# Altium PCB PCB1.PcbDoc
Units mm, origin at the board's own origin, x right, y up, seen from the top; angles counter-clockwise.
Board outline 76.2 x 38.1 mm, 4 copper layers (Top Layer, Layer 1, Layer 2, Bottom Layer), stack 0.603 mm thick; 33 components, 74 nets, 392 pads, 206 vias.
Unrouted connection lines stored in the file: 22.
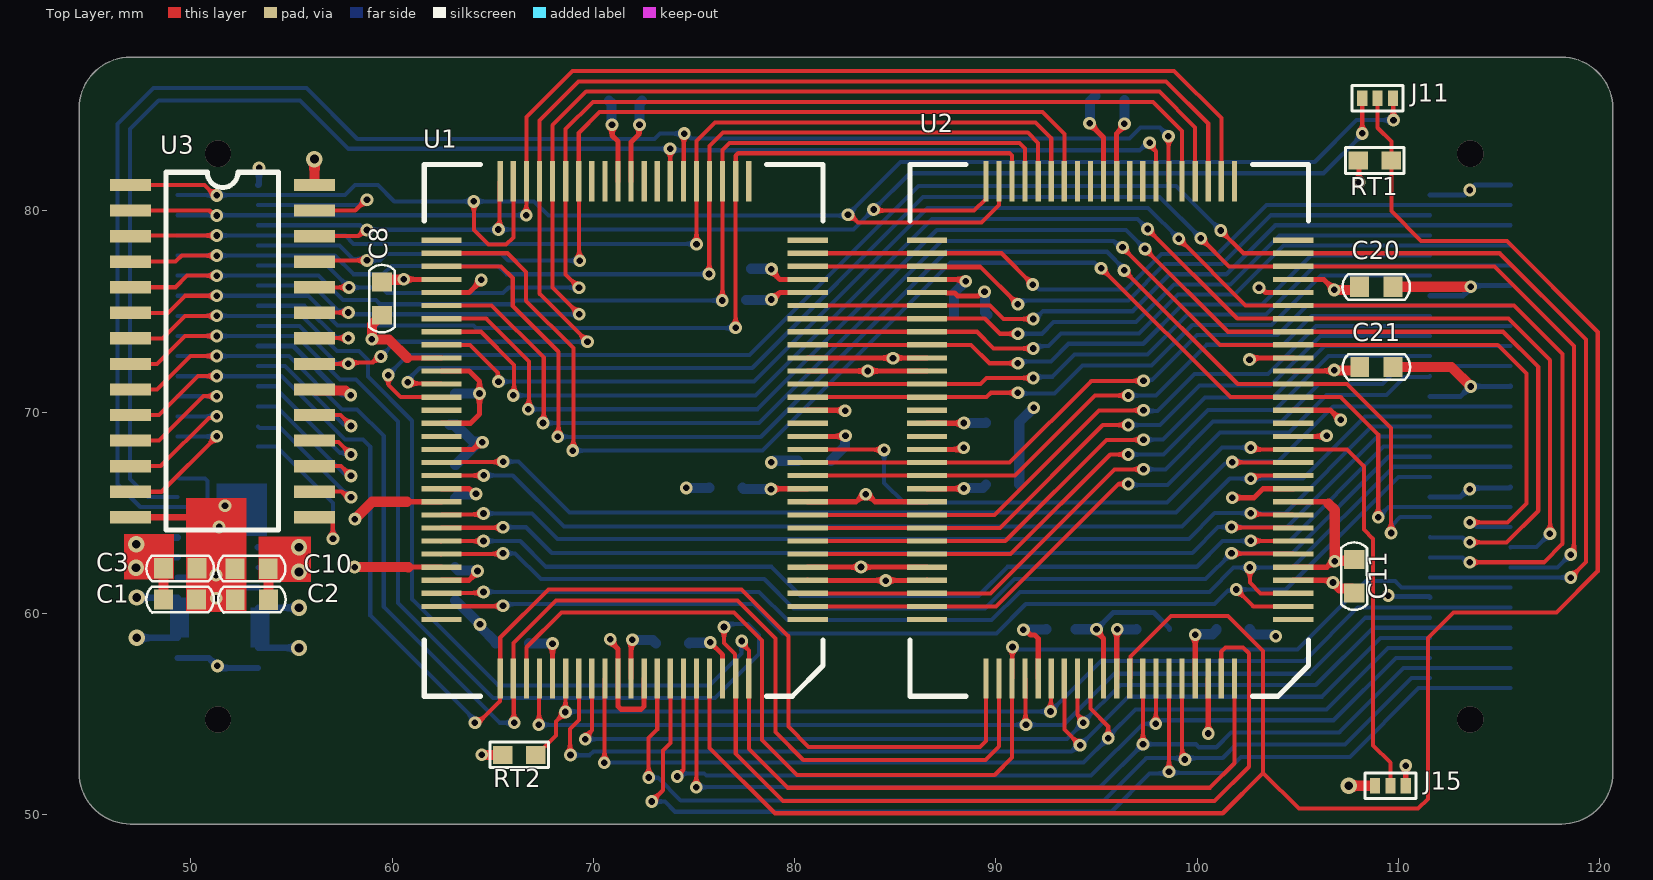
[diagram p0: Top Layer view]
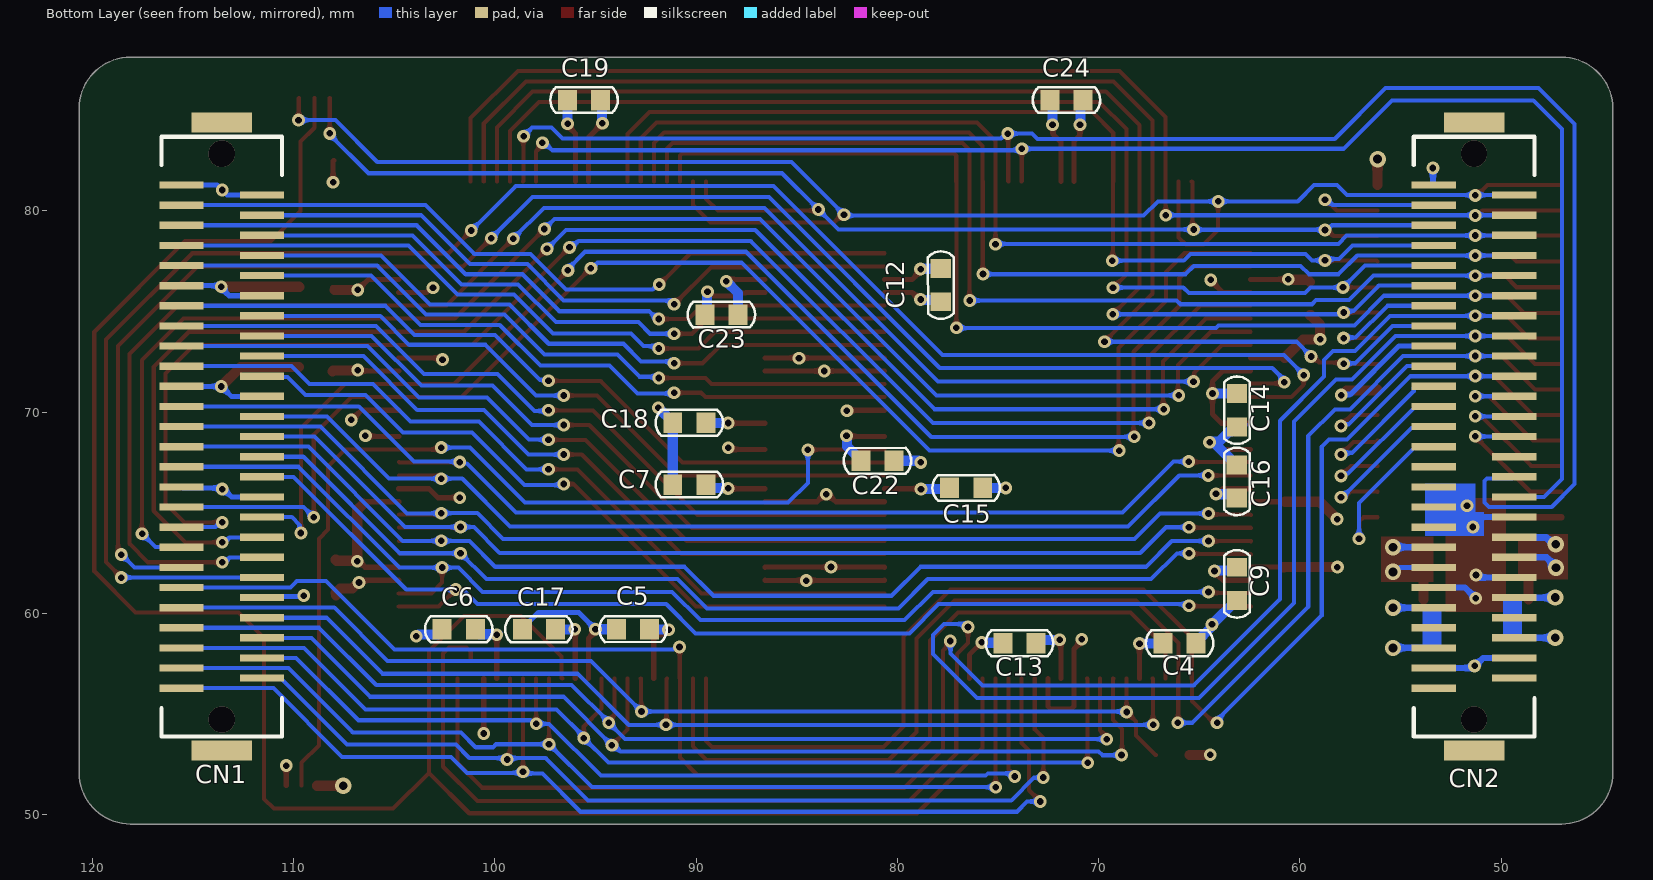
[diagram p1: Bottom Layer view, seen from below]
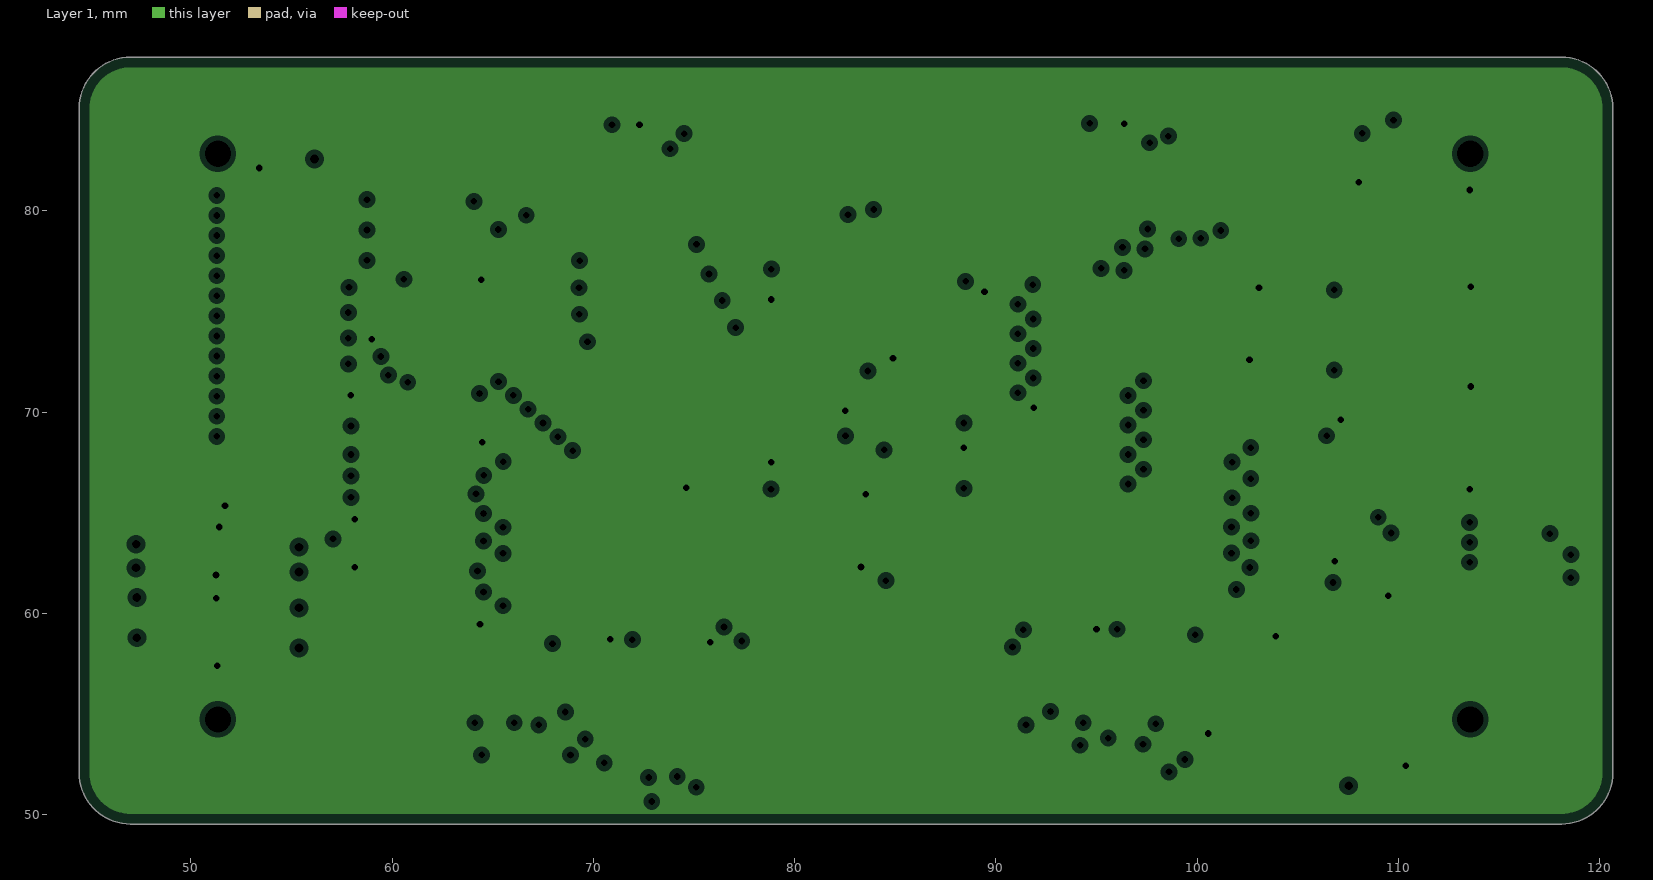
[diagram p2: Layer 1, clearances drawn from the general rule]
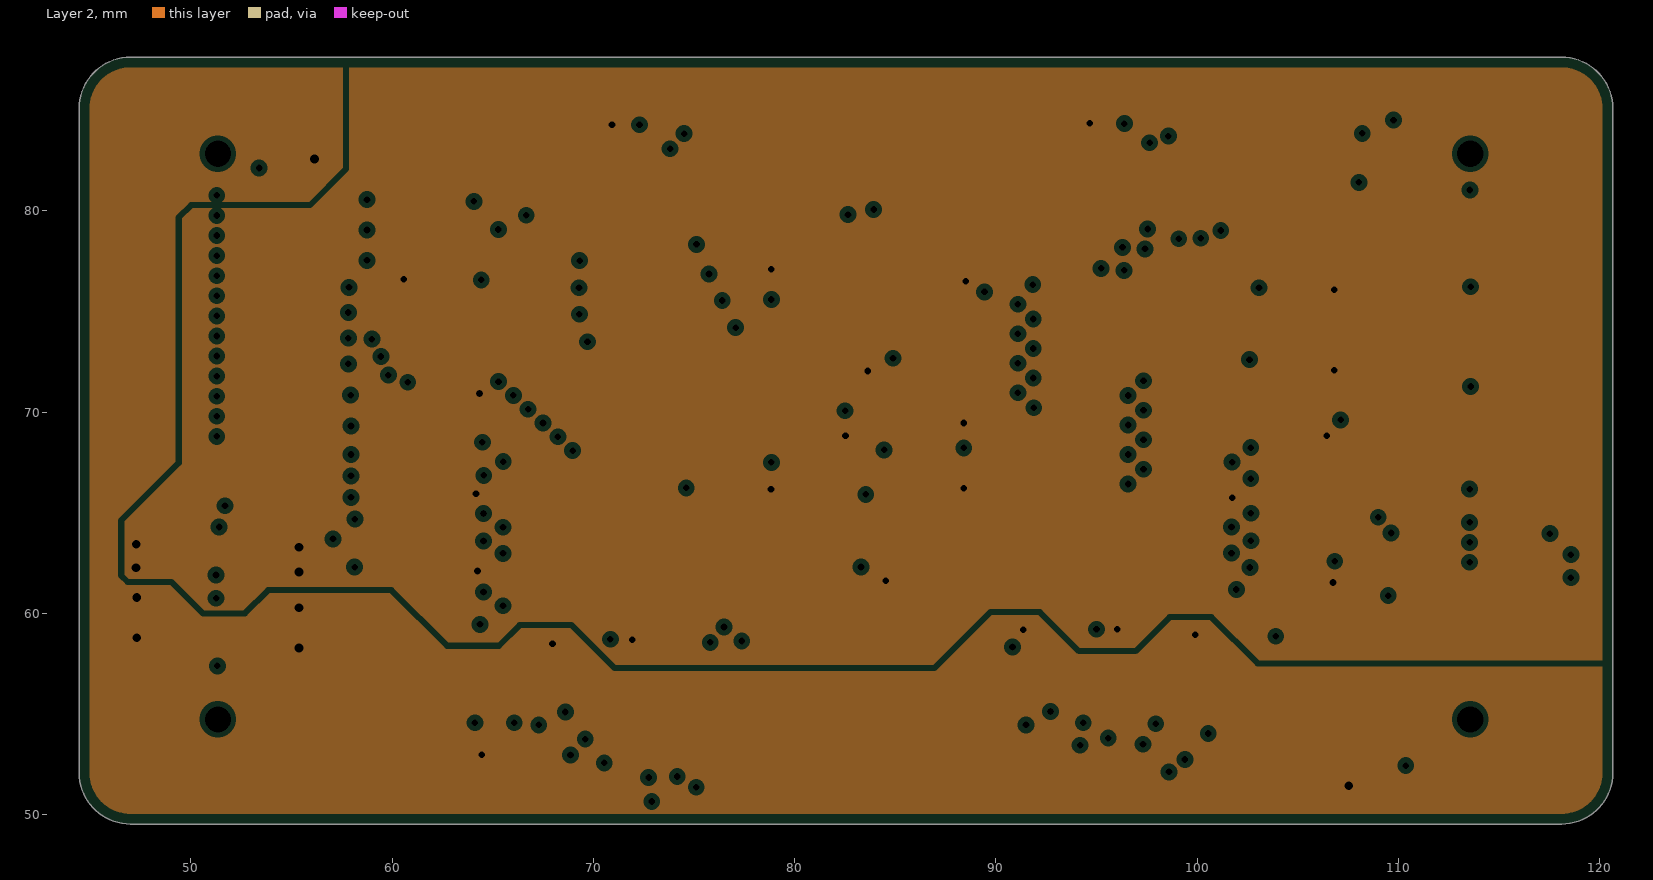
[diagram p3: Layer 2, clearances drawn from the general rule]

## Layer stack, top to bottom
Top Solder: solder mask 0.0102, Solder Resist, Dk 3.5
Top Layer: signal copper 0.0356
Dielectric 2: prepreg 0.0711, PP-006, Dk 4.1
Layer 1: plane copper 0.035, net GND
Dielectric 1: dielectric 0.32, FR-4, Dk 4.8
Layer 2: plane copper 0.035, net 33VCC
Dielectric 3: prepreg 0.0711, PP-006, Dk 4.1
Bottom Layer: signal copper 0.0356
Bottom Solder: solder mask 0.0102, Solder Resist, Dk 3.5

## Board outline
44.45,52.07 44.45,85.09 cw(c46.99,85.09) 46.99,87.63 118.11,87.63 cw(c118.11,85.09) 120.65,85.09 120.65,52.07 cw(c118.11,52.07) 118.11,49.53 46.99,49.53 cw(c46.99,52.07)

## Design rules (kind name [scope] priority, off if disabled: settings)
Clearance [All] p1: gap=0.127 ignorepadtopadclearanceinfootprint=FALSE except(0.152: Arc-Via Track-Via SMDPad-Via THPad-Via Via-Via; 0.254: Arc-Fill Arc-Poly Arc-Region Track-Fill Track-Poly Track-Region SMDPad-Fill SMDPad-Poly SMDPad-Region THPad-Fill THPad-Poly THPad-Region Via-Fill Via-Poly Via-Region Fill-Fill Fill-Poly Fill-Region Poly-Poly Poly-Region Region-Region)
HoleToHoleClearance [All] p1: gap=0 allowstackedmicrovias=TRUE
MinimumSolderMaskSliver [All] p1: minsoldermaskwidth=0
PlaneClearance [All] p1: clearance=0.254
PlaneConnect [All] p1: planeconnectstyle=Direct reliefexpansion=0.254 reliefentries=4 reliefconductorwidth=0.254 reliefairgap=0.254
PolygonConnect [All] p1: connectstyle=Relief reliefconductorwidth=0.254 reliefentries=4 polygonreliefangle="90 Angle" airgapwidth=0.254
RoutingVias [All] p1: holewidth=0.711 width=1.27 viastyle="Through Hole" minholewidth=0.711 minwidth=1.27 maxholewidth=0.711 maxwidth=1.27
SilkToSilkClearance [All] p1: silktosilkclearance=0
SilkToSolderMaskClearance [IsPad] p1: minsilkscreentomaskgap=0 clearancetoexposedcopper=TRUE
SolderMaskExpansion [All] p1: expansion=0.102 istentingtop=FALSE
Width [All] p1: maxlimit=2.54 minlimit=0.178 preferedwidth=0.203 minimp=50.000000 maximp=50.000000 favimp=50.000000
24 further rules are at their usual default settings.

## Components (designator, comment, footprint, x,y, rotation, side; value= is the part's Value field where it differs from the comment)
C1 "22uf" C0603 48.634,60.685 r0 top
C2 "22uf" C0603 53.854,60.679 r180 top
C3 "22uf" C0603 48.642,62.23 r0 top
C4 "22uf" C0603 66.802,58.517 r180 bottom
C5 "0.1uf" C0603 92.304,59.207 r0 bottom
C6 "0.1uf" C0603 100.966,59.203 r0 bottom
C7 "0.1uf" C0603 89.508,66.396 r0 bottom
C8 "0.1uf" C0603 59.495,76.46 r270 top
C9 "0.1uf" C0603 63.121,62.289 r270 bottom
C10 "0.1uf" C0603 53.844,62.224 r180 top
C11 "0.1uf" C0603 107.799,61.018 r90 top
C12 "0.1uf" C0603 77.835,77.131 r270 bottom
C13 "0.1uf" C0603 73.106,58.51 r0 bottom
C14 "0.1uf" C0603 63.121,70.915 r270 bottom
C15 "0.1uf" C0603 77.406,66.232 r180 bottom
C16 "0.1uf" C0603 63.127,65.725 r90 bottom
C17 "0.1uf" C0603 96.983,59.203 r0 bottom
C18 "0.1uf" C0603 89.508,69.465 r0 bottom
C19 "0.1uf" C0603 94.741,85.502 r0 bottom
C20 "0.1uf" C0603 108.071,76.214 r0 top
C21 "0.1uf" C0603 108.078,72.238 r0 top
C22 "0.1uf" C0603 81.811,67.577 r180 bottom
C23 "0.1uf" C0603 87.915,74.838 r0 bottom
C24 "0.1uf" C0603 70.769,85.502 r0 bottom
CN1 "CON51P" BTB1.0-51P 115.57,81.28 r270 bottom locked
CN2 "CON51P" BTB1.0-51P 53.34,81.28 r270 bottom locked
J11 "CON3" JMP 109.728,85.598 r180 top
J15 "CON3" JMP 110.363,51.435 r180 top
RT1 "10k" R0603 109.652,82.499 r180 top
RT2 "10k" R0603 67.137,52.962 r180 top
U1 "CACHE_32Kx32" PQFP100B 80.645,59.69 r90 top locked
U2 "CACHE_32Kx32" PQFP100B 104.775,59.69 r90 top locked
U3 "TAG_KM68V257C" SOJ-28 46.99,80.01 r0 top locked

## Footprints (in the part's own frame and the unit in brackets; to place one, negate y for a bottom-side part, rotate by r counter-clockwise, add the part's x,y. Pads: shape width x height; smd on the part's side, far side on the other; paste and mask are expansions set on the pad)
BTB1.0-51P [mm]
  rect 1x3 smd: 0(-3.1,2) 0(28.1,2)
  rect 0.36x2.2 smd: 1(0,0) 2(1,0) 3(2,0) 4(3,0) 5(4,0) 6(5,0) 7(6,0) 8(7,0) 9(8,0) 10(9,0) 11(10,0) 12(11,0) 13(12,0) 14(13,0) 15(14,0) 16(15,0) 17(16,0) 18(17,0) 19(18,0) 20(19,0) 21(20,0) 22(21,0) 23(22,0) 24(23,0) 25(24,0) 26(25,0) 27(24.5,4) 28(23.5,4) 29(22.5,4) 30(21.5,4) 31(20.5,4) 32(19.5,4) 33(18.5,4) 34(17.5,4) 35(16.5,4) 36(15.5,4) 37(14.5,4) 38(13.5,4) 39(12.5,4) 40(11.5,4) 41(10.5,4) 42(9.5,4) 43(8.5,4) 44(7.5,4) 45(6.5,4) 46(5.5,4) 47(4.5,4) 48(3.5,4) 49(2.5,4) 50(1.5,4) 51(0.5,4)
  silkscreen extent -2.4,-1 27.4,5
C0603 [mil]
  rect 37.01x40 smd: 1(0,0)
  rect 37x40 smd: 2(64.98,0)
  silkscreen extent -34,-25 98,25
JMP [mil]
  rect 20x30 smd: 1(0,0) 2(30,0) 3(60,0)
  silkscreen extent -20,-25 80,25
PQFP100B [mm]
  rect 0.26x2 smd: 1(0,0) 2(0.65,0) 3(1.3,0) 4(1.95,0) 5(2.6,0) 6(3.25,0) 7(3.9,0) 8(4.55,0) 9(5.2,0) 10(5.85,0) 11(6.5,0) 12(7.15,0) 13(7.8,0) 14(8.45,0) 15(9.1,0) 16(9.75,0) 17(10.4,0) 18(11.05,0) 19(11.7,0) 20(12.35,0) 21(13,0) 22(13.65,0) 23(14.3,0) 24(14.95,0) 25(15.6,0) 26(16.25,0) 27(16.9,0) 28(17.55,0) 29(18.2,0) 30(18.85,0) 51(18.85,18.2) 52(18.2,18.2) 53(17.55,18.2) 54(16.9,18.2) 55(16.25,18.2) 56(15.6,18.2) 57(14.95,18.2) 58(14.3,18.2) 59(13.65,18.2) 60(13,18.2) 61(12.35,18.2) 62(11.7,18.2) 63(11.05,18.2) 64(10.4,18.2) 65(9.75,18.2) 66(9.1,18.2) 67(8.45,18.2) 68(7.8,18.2) 69(7.15,18.2) 70(6.5,18.2) 71(5.85,18.2) 72(5.2,18.2) 73(4.55,18.2) 74(3.9,18.2) 75(3.25,18.2) 76(2.6,18.2) 77(1.95,18.2) 78(1.3,18.2) 79(0.65,18.2) 80(0,18.2)
  rect 2x0.26 smd: 31(21.775,2.925) 32(21.775,3.575) 33(21.775,4.225) 34(21.775,4.875) 35(21.775,5.525) 36(21.775,6.175) 37(21.775,6.825) 38(21.775,7.475) 39(21.775,8.125) 40(21.775,8.775) 41(21.775,9.425) 42(21.775,10.075) 43(21.775,10.725) 44(21.775,11.375) 45(21.775,12.025) 46(21.775,12.675) 47(21.775,13.325) 48(21.775,13.975) 49(21.775,14.625) 50(21.775,15.275) 81(-2.925,15.275) 82(-2.925,14.625) 83(-2.925,13.975) 84(-2.925,13.325) 85(-2.925,12.675) 86(-2.925,12.025) 87(-2.925,11.375) 88(-2.925,10.725) 89(-2.925,10.075) 90(-2.925,9.425) 91(-2.925,8.775) 92(-2.925,8.125) 93(-2.925,7.475) 94(-2.925,6.825) 95(-2.925,6.175) 96(-2.925,5.525) 97(-2.925,4.875) 98(-2.925,4.225) 99(-2.925,3.575) 100(-2.925,2.925)
  silkscreen extent -3.81,-0.76 22.61,19.05
R0603 [mil]
  rect 38x35 smd: 1(0,0) 2(65,0)
  silkscreen extent -25,-25 90,25
SOJ-28 [mil] "薄贴片"
  rect 80x24 smd: 1(0,50) 2(0,0) 3(0,-50) 4(0,-100) 5(0,-150) 6(0,-200) 7(0,-250) 8(0,-300) 9(0,-350) 10(0,-400) 11(0,-450) 12(0,-500) 13(0,-550) 14(0,-600) 15(360,-600) 16(360,-550) 17(360,-500) 18(360,-450) 19(360,-400) 20(360,-350) 21(360,-300) 22(360,-250) 23(360,-200) 24(360,-150) 25(360,-100) 26(360,-50) 27(360,0) 28(360,50)
  silkscreen extent 70,-625 290,75

## Part data
C1 C2 C3 C4 C5 C6 C7 C8 C9 C10 C11 C12 C13 C14 C15 C16 C17 C18 C19 C20 C21 C22 C23 C24: library part CAP
RT1 RT2: library part RES2

## Via types
v1: diameter 0.635, hole 0.33, Top Layer to Bottom Layer, tented both sides, 192 vias
v2: diameter 0.813, hole 0.432, Top Layer to Bottom Layer, tented both sides, 10 vias
v3: diameter 1.3, hole 1.3, Top Layer to Bottom Layer, tented both sides, 4 vias

## Nets (pads, with @x,y where several pads share a name; then routed paths per layer and width w, separated by ;. In a path a pad name is that pad's centre, name@x,y a point inside that pad or via, vN(x,y) a via of type N, cw(c..) or ccw(c..) an arc to the next point about the centre after c; other vN are vias at no path point)
33VCC: C1.1 C2.1 C3.1 C7.1 C8.1 C9.1 C10.1 C11.1 C12.1 C13.1 C14.1 C15.1 C16.1 C17.1 C18.1 C19.1 C20.1 C21.1 C22.1 C23.1 C24.1 CN2.19 CN2.20 CN2.33 CN2.34 U1.4 U1.11 U1.15 U1.20 U1.27 U1.41 U1.54 U1.61 U1.65 U1.70 U1.77 U1.91 U2.4 U2.11 U2.15 U2.20 U2.27 U2.41 U2.54 U2.61 U2.65 U2.70 U2.77 U2.91 | length 92.7
  Top Layer w0.203: v1(60.58,76.597) v1@60.584,76.594 ; U1.54@62.441,76.594 U1.54
  Top Layer w0.254: v1@60.584,76.594 U1.54@62.441,76.594 ; U1.77 63.818,61.64 64.238,62.06 v1(64.238,62.101) ; U1.70 63.826,66.19 64.095,65.921 64.168,65.921 v1(64.168,65.934) ; U1.65 63.886,69.44 64.34,69.894 v1(64.34,70.92) 64.34,71.526 63.826,72.04 U1.61 ; v1(70.926,84.276) 70.926,83.742 71.217,83.451 71.217,81.468 U1.41 ; U1.91 71.873,56.768 71.873,58.627 v1(71.937,58.691) ; v1@78.71,66.183 78.714,66.187 80.642,66.187 U1.11 ; v1(78.842,77.101) 78.842,77.012 79.264,76.59 U1.27 ; U1.4 80.648,61.637 84.516,61.637 v1(84.529,61.624) 84.542,61.637 86.572,61.637 U2.77 ; U1.15 80.648,68.793 82.498,68.793 v1(82.522,68.817) ; U1.20 v1@83.705,72.04 ; v1(83.635,72.04) U2.61 ; U2.70 v1@88.503,66.19 ; U2.65 v1@88.503,69.44 ; U2.54 88.298,76.59 88.393,76.495 v1(88.496,76.495) ; v1(94.653,84.344) 95.35,83.648 U2.41 ; U2.91 96.003,56.768 96.003,59.168 v1@96.023,59.188 ; v1(101.738,65.743) 102.827,65.743 103.274,66.19 U2.11 ; U2.4 v1@106.539,61.64 ; U2.15 104.778,68.793 106.403,68.793 v1(106.431,68.822) ; U2.20 104.778,72.043 106.669,72.043 v1@106.709,72.083 ; U2.27 106.291,76.59 v1(106.811,76.07) ; C20.1@107.961,76.07 C20.1@108.075,76.184
  Top Layer w0.508: v2(47.272,62.258) 47.286,62.244 48.628,62.244 C3.1 48.638,62.226 48.638,60.689 C1.1 ; C10.1 C10.1@53.849,62.219 ; C2.1 53.849,60.684 C10.1@53.849,62.219 ; v2@55.386,62.056 55.328,62.114 53.954,62.114 C10.1@53.849,62.219 ; C8.1 59.608,76.573 60.556,76.573 v1(60.58,76.597) ; v1(106.749,61.532) 106.784,61.532 107.086,61.23 107.69,61.23 C11.1@107.906,61.014 ; v1(106.811,72.083) 106.835,72.058 108.023,72.058 C21.1@108.071,72.011 ; v1(106.811,76.07) C20.1@107.961,76.07 ; C11.1@107.855,60.955 107.893,60.917 C11.1@107.893,60.879
  Bottom Layer w0.254: CN2.20 55.011,62.28
  Bottom Layer w0.33: v2(47.272,62.258) 47.272,62.307 47.745,62.78 CN2.33@49.337,62.78 ; v2(47.276,63.429) 47.406,63.429 47.745,63.767 49.339,63.767 CN2.34@49.344,63.773 ; CN2.19@53.336,63.287 v2@55.358,63.287
  Bottom Layer w0.508: C9.1 63.284,62.125 64.214,62.125 v1(64.238,62.101) ; C16.1 63.314,65.912 64.147,65.912 v1(64.168,65.934) ; C14.1@63.126,70.915 63.129,70.918 64.337,70.918 v1(64.34,70.92) ; C24.1@70.769,85.477 70.902,85.343 70.902,84.301 v1(70.926,84.276) ; v1(71.937,58.691) 71.961,58.666 72.95,58.666 C13.1 ; C15.1 77.467,66.172 v1@78.773,66.172 ; C12.1@77.835,77.124 78.819,77.124 v1(78.842,77.101) ; C22.1 81.811,67.615 82.498,68.302 82.498,68.793 v1(82.522,68.817) ; C23.1 87.915,75.914 v1(88.496,76.495) ; v1(88.409,66.205) 88.434,66.23 89.341,66.23 C7.1 ; v1(88.409,69.455) 88.414,69.46 89.503,69.46 C18.1 ; v1(94.653,84.344) 94.678,84.369 94.678,85.439 C19.1 C19.1@94.948,85.709 ; v1@96.023,59.188 96.031,59.195 96.976,59.195 C17.1
  other v1: 96.023,59.205 78.821,66.172
  other v2: 55.369,62.056 55.369,63.287
AD2: CN2.36 U1.37 U2.37 | length 76.2
  Top Layer w0.203: v1(73.81,83.081) 73.815,83.076 73.815,81.47 U1.37 ; v1(97.637,83.383) 97.637,83.267 97.95,82.953 U2.37
  Bottom Layer w0.203: CN2.36 47.863,65.78 46.969,66.674 46.969,84.057 48.4,85.487 55.415,85.487 57.821,83.081 v1(73.81,83.081) 73.885,83.006 97.143,83.006 97.52,83.383 v1(97.637,83.383)
AD3: CN2.37 U1.36 U2.36 | length 84.8
  Top Layer w0.203: U1.36 74.489,81.484 74.489,83.816 v1(74.508,83.835) ; v1(98.569,83.708) 98.585,83.692 98.585,81.48 U2.36
  Bottom Layer w0.203: CN2.37 49.418,66.702 50.706,66.702 50.825,66.583 50.825,65.509 50.608,65.291 47.482,65.291 46.356,66.417 46.356,84.311 48.145,86.1 55.741,86.1 58.265,83.576 73.042,83.576 73.3,83.835 v1(74.508,83.835) 74.604,83.835 74.843,83.596 96.645,83.596 97.18,84.131 98.146,84.131 v1(98.569,83.708)
AD4: CN2.49 U1.35 U2.45 U3.3 | length 55.9
  Top Layer w0.203: U3.3 47.021,78.771 v1(51.284,78.771) ; U1.35 75.121,78.346 v1@75.133,78.334 ; U1.35 75.12,83.477 76.035,84.391 91.961,84.391 92.75,83.602 U2.45
  Bottom Layer w0.203: CN2.49 49.345,78.775 51.28,78.775 v1(51.284,78.771) 57.672,78.771 58.084,78.359 75.082,78.359 v1@75.108,78.334
  other v1: 75.121,78.332
AD5: CN2.48 U1.34 U2.46 U3.4 | length 56.6
  Top Layer w0.203: U3.4 49.242,77.47 49.544,77.773 v1(51.284,77.773) ; v1(75.743,76.86) 75.756,76.874 75.756,81.451 U1.34 75.77,83.212 76.439,83.881 91.582,83.881 92.1,83.363 U2.46
  Bottom Layer w0.203: CN2.48 49.344,77.776 51.281,77.776 v1(51.284,77.773) 57.147,77.773 58.072,76.848 59.547,76.848 59.963,77.263 65.271,77.263 65.686,76.848 75.73,76.848 v1(75.743,76.86)
AD6: CN2.47 U1.33 U2.47 U3.5 | length 56.7
  Top Layer w0.203: U3.5 49.226,76.2 49.8,76.775 v1(51.284,76.775) ; v1@76.436,75.557 76.412,75.582 76.412,81.457 U1.33 76.42,83.024 76.766,83.37 91.178,83.37 91.45,83.099 U2.47
  Bottom Layer w0.203: CN2.47 49.343,76.777 51.282,76.777 v1(51.284,76.775) 56.347,76.775 57.551,75.571 59.188,75.571 59.403,75.355 65.936,75.355 66.12,75.54 v1(76.403,75.54)
AD7: CN2.46 U1.32 U2.48 U3.6 | length 56.5
  Top Layer w0.203: U3.6 48.865,74.93 49.712,75.777 v1(51.284,75.777) ; v1(77.064,74.193) 77.067,74.197 77.067,81.462 U1.32 77.07,82.734 77.196,82.86 90.681,82.86 90.8,82.741 U2.48
  Bottom Layer w0.203: CN2.46 51.284,75.78 55.816,75.78 57.293,74.304 64.037,74.304 64.173,74.168 76.835,74.168 v1@76.86,74.193
AD8: CN2.45 U1.100 U2.100 U3.7 | length 82.5
  Top Layer w0.203: U3.7 48.584,73.66 49.703,74.779 v1(51.284,74.779) ; v1(77.368,58.623) 77.368,58.506 77.72,58.155 U1.100 77.72,53.268 79.654,51.333 100.635,51.333 101.85,52.549 U2.100
  Bottom Layer w0.203: CN2.45 55.524,74.78 57.264,73.041 58.346,73.041 58.802,72.584 58.802,71.756 60.992,69.566 60.992,60.699 65.272,56.419 75.773,56.419 77.355,58.001 77.355,58.61 v1(77.368,58.623)
AD9: CN2.44 U1.99 U2.99 U3.8 | length 91.6
  Top Layer w0.203: U3.8 48.319,72.39 49.71,73.781 v1(51.284,73.781) ; v1(76.489,59.321) 76.489,58.52 77.042,57.967 77.042,56.793 U1.99 77.07,53.029 79.426,50.673 100.863,50.673 102.565,52.375 102.565,58.014 102.286,58.293 101.397,58.293 101.194,58.09 101.194,57.785
  Bottom Layer w0.203: CN2.44 51.284,73.78 55.236,73.78 57.4,71.616 58.199,71.616 60.289,69.526 60.289,60.509 65.011,55.788 76.034,55.788 78.222,57.976 78.222,58.921 77.677,59.467 76.751,59.467 76.606,59.321 v1(76.489,59.321)
AD10: CN2.43 U1.82 U2.82 U3.9 | length 72.9
  Top Layer w0.203: U3.9 48.315,71.12 49.978,72.783 v1(51.284,72.783) ; v1(66.065,54.559) 66.043,54.582 66.043,56.742 U1.82 66.02,58.522 68.131,60.633 77.157,60.633 79.045,58.745 79.045,54.097 80.427,52.715 89.474,52.715 90.15,53.391 U2.82
  Bottom Layer w0.203: CN2.43 51.284,72.78 54.87,72.78 57.514,70.135 58.26,70.135 59.583,68.812 59.583,60.323 65.347,54.559 v1(66.065,54.559)
AD11: CN2.42 U1.81 U2.81 U3.10 | length 70.9
  Top Layer w0.203: U3.10 48.421,69.85 50.356,71.785 v1(51.284,71.785) ; v1@64.109,54.688 64.155,54.642 64.361,54.642 65.35,55.631 65.35,56.745 U1.81 65.37,58.791 67.771,61.192 77.361,61.192 79.695,58.858 79.695,54.366 80.696,53.365 89.205,53.365 89.5,53.661 U2.81
  Bottom Layer w0.203: CN2.42 51.284,71.78 54.496,71.78 57.647,68.629 58.558,68.629 58.913,68.274 58.913,59.885 v1@64.109,54.688
  other v1: 64.109,54.559
AD12: CN2.4 U1.44 U2.44 U3.25 | length 52.7
  Top Layer w0.203: U3.25 56.197,77.534 v1@58.7,77.534 ; v1(69.317,77.521) 69.293,77.544 69.293,81.442 U1.44 69.27,83.875 70.297,84.902 92.314,84.902 93.4,83.816 U2.44
  Bottom Layer w0.203: CN2.4 57.391,78.28 58.058,77.613 v1@58.621,77.613 ; v1(58.748,77.534) 59.392,77.534 59.72,77.861 65.425,77.861 65.765,77.521 v1(69.317,77.521)
AD13: CN2.5 U1.45 U2.35 U3.24 | length 60.8
  Top Layer w0.203: U3.24 56.141,76.193 v1(57.854,76.193) ; v1(69.286,76.178) 68.62,76.844 68.62,84.063 69.969,85.413 97.798,85.413 99.25,83.96 U2.35
  Bottom Layer w0.203: CN2.5 56.767,77.28 57.863,76.184 57.865,76.185 59.473,76.185 59.751,75.907 65.515,75.907 65.793,76.185 69.279,76.185 v1(69.286,76.178)
AD14: CN2.6 U1.46 U2.34 U3.23 | length 64.3
  Top Layer w0.203: U3.23 56.147,74.943 v1(57.826,74.943) v1@57.845,74.943 ; v1(69.3,74.857) 67.97,76.188 U1.46 67.97,84.251 69.642,85.923 98.125,85.923 99.9,84.148 U2.34
  Bottom Layer w0.203: CN2.6 56.076,76.28 57.331,75.025 57.743,75.025 57.908,74.86 58.158,74.86 58.161,74.857 v1(69.3,74.857)
AD15: CN2.8 U1.47 U2.33 U3.21 | length 69.1
  Top Layer w0.203: U3.21 56.14,72.396 v1(57.826,72.396) 57.885,72.455 59.02,72.455 59.322,72.757 v1(59.439,72.757) ; v1(69.706,73.494) 67.32,75.879 U1.47 67.32,84.49 69.263,86.434 98.453,86.434 100.55,84.337 U2.33
  Bottom Layer w0.203: CN2.8 55.4,74.28 57.257,72.423 57.799,72.423 v1(57.826,72.396) ; v1(59.439,72.757) 60.175,73.494 v1(69.706,73.494)
AD16: CN2.50 U1.48 U2.32 U3.2 | length 66.2
  Top Layer w0.203: U3.2 50.926,80.01 51.167,79.768 v1(51.284,79.768) ; v1(66.659,79.78) 66.665,79.785 66.665,81.46 U1.48 66.67,84.653 68.961,86.944 98.857,86.944 101.2,84.601 U2.32
  Bottom Layer w0.203: CN2.50 v1(66.659,79.78) v1@66.706,79.733
AD17: CN2.51 J11.1 U1.49 U2.49 U3.1 | length 84.5
  Top Layer w0.203: U3.1 50.665,81.28 51.091,80.854 v1@51.091,80.766 ; v1(64.059,80.467) 64.059,79.045 64.785,78.318 65.658,78.318 66.02,78.68 U1.49 ; v1(82.652,79.807) 82.768,79.807 83.149,79.427 89.282,79.427 90.15,80.295 U2.49 ; J11.1 109.741,85.585 109.741,84.519 v1(109.753,84.506)
  Bottom Layer w0.203: CN2.51 57.654,80.78 58.154,81.28 59.291,81.28 60.104,80.467 v1(64.059,80.467) 67.056,80.467 67.767,79.756 82.601,79.756 v1(82.652,79.807) 85.268,82.423 105.842,82.423 107.925,84.506 109.671,84.506 109.674,84.509 109.75,84.509 v1(109.753,84.506)
  other v1: 51.284,80.766
AD18: CN2.3 J11.3 U1.50 U2.50 U3.26 | length 70.8
  Top Layer w0.203: U3.26 56.146,78.752 58.336,78.752 58.631,79.047 v1(58.748,79.047) ; v1(65.278,79.07) 65.342,79.134 65.342,81.437 U1.50 ; v1(83.922,80.061) 83.972,80.01 88.915,80.01 89.5,80.595 U2.50 ; v1@108.179,83.718 108.204,83.744 v1(108.204,83.845) J11.3
  Bottom Layer w0.203: CN2.3 58.398,79.28 58.631,79.047 v1(58.748,79.047) 58.76,79.059 65.266,79.059 v1(65.278,79.07) 82.931,79.07 v1(83.922,80.061) 85.725,81.864 106.274,81.864 108.204,83.795 v1(108.204,83.845)
ADS#: CN1.30 U1.84 U2.84 | length 51.1
  Top Layer w0.203: v1(67.285,54.458) 67.302,54.475 67.302,56.747 U1.84 ; U2.84 91.47,56.745 91.47,54.478 v1(91.491,54.458)
  Bottom Layer w0.203: v1(67.285,54.458) v1(91.491,54.458) 93.345,54.458 95.885,56.998 105.584,56.998 108.366,59.78 CN1.30
ADV#: CN1.21 U1.83 U2.83 | length 64.8
  Top Layer w0.203: U1.83 66.67,58.313 68.406,60.049 76.978,60.049 78.384,58.643 78.384,53.696 80.112,51.968 89.941,51.968 90.802,52.829 90.802,56.765 90.812,56.774 90.812,58.311 v1(90.824,58.323)
  Bottom Layer w0.203: v1(90.824,58.323) 90.906,58.241 91.101,58.241 91.138,58.204 104.991,58.204 108.384,61.598 109.84,61.598 110.158,61.28 CN1.21
BE0#: CN1.25 U1.96 U2.93 | length 51.7
  Top Layer w0.203: v1(75.108,51.359) 75.114,51.365 75.114,56.759 U1.96 ; U2.93 97.304,56.761 97.304,53.496 v1(97.307,53.492)
  Bottom Layer w0.203: v1(75.108,51.359) 95.174,51.359 v1(97.307,53.492) 99.931,53.492 100.081,53.343 100.947,53.343 101.681,54.076 107.057,54.076 110.26,57.28 CN1.25
BE1#: CN1.28 U1.95 U2.94 | length 47.2
  Top Layer w0.203: v1(74.168,51.892) 74.168,51.925 74.47,52.227 U1.95 ; v1(97.942,54.508) 97.946,54.512 97.946,56.761 U2.94
  Bottom Layer w0.203: v1(74.168,51.892) 74.285,51.892 74.437,52.045 75.5,52.045 75.611,51.933 94.732,51.933 97.307,54.508 98.059,54.508 98.236,54.685 106.776,54.685 109.871,57.78 CN1.28
BE2#: CN1.26 U1.94 U2.95 | length 56.6
  Top Layer w0.203: v1(72.898,50.648) 73.457,51.206 73.457,53.188 73.82,53.551 U1.94 ; U2.95 U2.95 98.601,52.122 v1(98.603,52.121)
  Bottom Layer w0.203: v1(72.898,50.648) 73.552,50.648 74.06,50.14 77.114,50.14 95.741,50.14 97.639,52.038 98.52,52.038 v1(98.603,52.121) 98.654,52.07 101.378,52.07 102.177,52.869 107.584,52.869 110.994,56.28 CN1.26
BE3#: CN1.27 U1.93 U2.96 | length 51
  Top Layer w0.203: v1(72.746,51.841) 72.746,53.797 73.17,54.222 U1.93 ; U2.96 99.25,52.992 99.39,52.852 v1(99.39,52.735)
  Bottom Layer w0.203: v1(72.746,51.841) 72.758,51.829 73.207,51.829 74.338,50.698 95.362,50.698 97.47,52.807 99.318,52.807 v1(99.39,52.735) ; v1@99.39,52.807 101.27,52.807 101.936,53.473 107.344,53.473 CN1.27@110.572,56.701 ; CN1.27@110.572,56.702 110.65,56.78 CN1.27
BWE#: CN1.29 U1.87 U2.87 | length 52.8
  Top Layer w0.203: v1(68.859,52.959) 68.834,52.984 68.834,54.254 69.281,54.701 69.281,56.754 U1.87 ; U2.87 93.4,54.225 v1(94.183,53.442)
  Bottom Layer w0.203: v1(68.859,52.959) 68.87,52.948 69.814,52.948 70.007,53.141 93.766,53.141 94.066,53.442 v1(94.183,53.442) 96.596,55.855 106.193,55.855 109.119,58.78 CN1.29
COE#: CN1.22 RT2.1 U1.86 U2.86 | length 55.2
  Top Layer w0.203: RT2.1 67.175,52.962 68.14,53.927 68.14,54.627 v1(68.605,55.093) 68.631,55.118 68.613,55.136 68.613,56.758 U1.86 ; v1(92.71,55.118) 92.73,55.138 92.73,56.745 U2.86
  Bottom Layer w0.203: v1@68.631,55.118 v1(92.71,55.118) 95.225,57.633 105.33,57.633 107.977,60.28 CN1.22
FT#: J15.2 U1.14 U2.14 | length 47.3
  Top Layer w0.203: U1.14@80.645,68.148 80.664,68.129 84.434,68.129 v1(84.445,68.119) ; v1@102.919,68.14 U2.14 107.448,68.14 108.284,67.304 108.284,64.161 108.743,63.702 108.743,53.433 109.601,52.575 J15.2
  Bottom Layer w0.203: v1(84.445,68.119) 84.445,66.482 85.425,65.502 98.492,65.502 101.223,68.233 v1(102.663,68.233)
GND: C1.2 C2.2 C3.2 C4.2 C5.2 C6.2 C7.2 C8.2 C9.2 C10.2 C11.2 C12.2 C13.2 C14.2 C15.2 C16.2 C17.2 C18.2 C19.2 C20.2 C21.2 C22.2 C23.2 C24.2 CN1.1 CN1.6 CN1.11 CN1.16 CN1.31 CN1.36 CN1.41 CN1.46 CN1.51 CN2.1 CN2.9 CN2.16 CN2.17 CN2.18 CN2.21 CN2.25 CN2.28 CN2.32 CN2.35 J15.1 RT1.2 U1.5 U1.10 U1.17 U1.21 U1.26 U1.40 U1.55 U1.60 U1.67 U1.71 U1.76 U1.90 U1.92 U1.98 U2.5 U2.10 U2.17 U2.21 U2.26 U2.40 U2.55 U2.60 U2.67 U2.71 U2.76 U2.90 U2.98 U3.14 U3.20 | length 162.3
  Top Layer w0.254: 60.725,65.54 U1.71 ; 60.75,72.69 U1.60 ; 60.795,62.293 62.442,62.293 U1.76 ; U1.67 64.018,68.14 64.379,68.501 v1(64.482,68.501) ; U1.55 63.826,75.94 64.425,76.539 v1(64.425,76.565) ; v1(70.839,58.708) 70.839,58.605 71.22,58.224 U1.90 71.22,55.382 71.369,55.233 72.371,55.233 72.52,55.382 U1.92 ; U1.40 71.87,83.409 72.261,83.8 72.261,84.229 v1@72.286,84.255 ; v1(75.803,58.552) 76.42,57.936 U1.98 ; v1(78.842,75.59) 78.914,75.59 79.264,75.94 U1.26 ; U1.5 80.648,62.293 83.284,62.293 v1(83.295,62.303) 83.305,62.293 86.572,62.293 U2.76 ; U1.10 83.056,65.54 83.426,65.91 v1(83.53,65.91) 83.633,65.91 84.003,65.54 U2.71 ; U1.17 80.648,70.087 82.428,70.087 82.452,70.062 v1(82.505,70.062) ; U1.21 80.648,72.687 84.868,72.687 v1(84.884,72.671) ; v1@85.06,72.69 U2.60 ; U2.67 88.22,68.14 88.256,68.177 88.399,68.177 v1@88.403,68.173 ; U2.55 86.578,75.937 87.528,75.937 87.541,75.924 87.941,75.924 88.089,75.775 89.131,75.775 89.328,75.972 v1(89.431,75.972) ; v1(94.996,59.205) 94.996,59.102 95.35,58.749 U2.90 ; U2.40 96,83.842 96.383,84.225 v1(96.383,84.328) ; v1(100.55,54.026) U2.98 ; v1(102.599,72.605) 102.702,72.605 102.788,72.69 U2.21 ; v1(103.073,76.175) 103.163,76.175 103.398,75.94 U2.26 ; U2.5 106.435,62.29 106.734,62.589 v1(106.837,62.589) ; U2.10 106.433,65.54 106.525,65.448 ; U2.17 106.621,70.09 107.129,69.583 v1(107.129,69.61) ; RT1.2 108.037,82.463 v1(108.037,81.413) ; J15.1 110.363,52.295 110.323,52.336 110.323,52.391 v1(110.364,52.432)
  Top Layer w0.305: U3.14 50.831,64.77 51.311,64.291 v1(51.4,64.291)
  Top Layer w0.508: U3.20 56.185,71.069 57.674,71.069 57.903,70.841 v1(57.937,70.841) ; v1(58.134,62.295) 60.792,62.295 60.795,62.293 ; v1(58.147,64.681) 59.005,65.54 60.725,65.54 ; C8.2 59.457,74.81 58.992,74.345 v1(58.992,73.622) 59.016,73.598 59.843,73.598 60.75,72.69 ; 106.525,65.448 106.837,65.136 v1(106.837,62.589) 106.862,62.613 107.855,62.613 C11.2@107.906,62.664 ; C20.2 109.727,76.22 113.583,76.22 v1(113.589,76.225) ; C21.2 112.624,72.238 v1(113.589,71.272)
  Bottom Layer w0.254: CN2.9 55.08,73.28 57.489,70.872 57.906,70.872 v1(57.937,70.841) ; v1(94.996,59.205) 95.829,60.038 97.837,60.038 98.634,59.241 C17.2 ; v1(109.49,60.879) 109.54,60.83 111.52,60.83 CN1.31 ; CN1.36 113.076,65.78 113.468,66.172 v1(113.538,66.172) 113.571,66.172 113.626,66.227 115.517,66.227 CN1.16 ; CN1.41 113.093,70.78 113.586,71.272 v1(113.589,71.272) 113.593,71.276 115.566,71.276 CN1.11 ; CN1.46 113.206,75.78 113.706,76.28 CN1.6 ; CN1.51 113.297,80.78 v1(113.547,81.03) 113.797,81.28 CN1.1
  Bottom Layer w0.305: CN2.28 50.897,57.78 51.29,57.387 v1(51.315,57.387) 51.404,57.387 51.511,57.28 CN2.25 ; CN2.32 51.033,61.78 51.153,61.9 v1(51.243,61.9) ; CN2.35 50.897,64.78 51.386,64.291 v1(51.4,64.291) ; v1(51.254,60.745) 51.789,61.28 CN2.21 ; v1@51.59,64.28 CN2.18 ; v1(51.696,65.344) 51.732,65.308 53.312,65.308 CN2.17 ; CN2.1 53.352,81.28 53.38,81.308 53.38,82.119 v1(53.389,82.128)
  Bottom Layer w0.508: C14.2@62.865,69.373 63.182,69.373 63.182,69.247 63.38,69.049 63.491,69.049 64.015,68.525 64.458,68.525 v1(64.482,68.501) 64.458,68.476 64.266,68.476 63.165,67.376 C16.2 ; C9.2 63.159,60.638 64.348,59.449 v1(64.366,59.449) 64.366,59.341 65.152,58.555 C4.2 ; v1@72.286,84.311 72.286,85.344 C24.2@72.419,85.477 ; v1@74.614,66.184 74.614,66.207 74.639,66.232 C15.2@75.755,66.232 ; C13.2 74.777,58.531 75.782,58.531 v1(75.803,58.552) ; C12.2@77.59,75.566 78.817,75.566 v1(78.842,75.59) ; v1(78.841,67.497) 78.875,67.497 78.955,67.577 C22.2 ; v1(89.431,75.972) 89.455,75.948 89.455,74.949 C23.2 ; C7.2 C18.2 91.158,69.503 91.847,70.192 v1@91.919,70.192 ; C5.2 C5.2 v1@94.995,59.206 ; v1(96.383,84.328) 96.387,84.332 96.387,85.498 C19.2 ; C6.2 102.616,59.165 102.832,58.949 103.781,58.949 103.869,58.861 v1(103.903,58.861)
  other v1: 74.614,66.231 88.403,68.22 91.88,70.212 72.286,84.276
GW#: CN1.23 U1.88 U2.88 | length 53.8
  Top Layer w0.203: v1(69.596,53.746) 69.596,53.863 69.92,54.187 U1.88 ; U2.88 94.053,56.762 94.053,54.959 94.336,54.676 v1(94.336,54.559)
  Bottom Layer w0.203: v1(69.596,53.746) 93.523,53.746 v1(94.336,54.559) 94.336,54.591 96.186,56.441 105.891,56.441 108.73,59.28 CN1.23
HD0: CN1.2 U1.29 U2.52 | length 37.4
  Top Layer w0.203: U1.29 U2.52 90.27,77.89 v1(91.828,76.332)
  Bottom Layer w0.203: v1(91.828,76.332) 91.919,76.332 92.163,76.089 96.463,76.089 98.22,77.846 101.02,77.846 103.454,80.28 CN1.2
HD1: CN1.50 U1.28 U2.53 | length 36.3
  Top Layer w0.203: U1.28 U2.53 89.206,77.24 89.255,77.191 ; U2.53@86.487,77.191 89.255,77.191 ; v1(91.09,75.356) 89.255,77.191
  Bottom Layer w0.203: v1@91.034,75.549 96.581,75.549 98.377,77.346 101.238,77.346 103.673,79.78 CN1.50
HD2: CN1.3 U1.25 U2.56 | length 37.1
  Top Layer w0.203: U1.25 U2.56 89.708,75.29 90.376,74.623 v1(91.854,74.623)
  Bottom Layer w0.203: v1(91.854,74.623) 91.959,74.623 92.347,75.01 96.798,75.01 98.634,76.846 101.445,76.846 103.88,79.28 CN1.3
HD3: CN1.49 U1.24 U2.57 | length 33.3
  Top Layer w0.203: U1.24 U2.57 89.444,74.64 90.194,73.89 v1(91.09,73.89)
  Bottom Layer w0.203: v1@91.034,73.99 v1@91.09,73.99 ; v1(91.09,73.89) 92.279,73.89 92.86,74.471 96.966,74.471 98.841,76.346 101.653,76.346 104.087,78.78 CN1.49
HD4: CN1.4 U1.23 U2.58 | length 37.3
  Top Layer w0.203: U1.23 U2.58 89.053,73.99 89.886,73.157 v1(91.854,73.157)
  Bottom Layer w0.203: v1@91.923,73.279 92.608,73.279 93.234,73.905 97.107,73.905 99.048,75.846 101.86,75.846 104.294,78.28 CN1.4
HD5: CN1.48 U1.22 U2.59 | length 33.5
  Top Layer w0.203: U1.22 U2.59 88.763,73.34 89.679,72.424 v1(91.09,72.424)
  Bottom Layer w0.203: v1@91.034,72.517 92.735,72.517 93.611,73.392 97.319,73.392 99.273,75.346 103.214,75.346 105.648,77.78 CN1.48
HD6: CN1.5 U1.19 U2.62 | length 37.3
  Top Layer w0.203: U1.19 U2.62 86.58,71.395 89.235,71.395 89.531,71.691 v1(91.854,71.691)
  Bottom Layer w0.203: v1@91.897,71.755 92.812,71.755 93.91,72.853 97.529,72.853 99.522,74.846 103.41,74.846 105.844,77.28 CN1.5
HD7: CN1.47 U1.18 U2.63 | length 33.5
  Top Layer w0.203: U1.18 U2.63 89.536,70.74 89.754,70.958 v1(91.09,70.958)
  Bottom Layer w0.203: v1@91.034,70.917 92.913,70.917 94.31,72.314 97.739,72.314 99.756,74.33 103.697,74.33 106.147,76.78 CN1.47
HD8: CN1.7 U1.13 U2.68 | length 38.2
  Top Layer w0.203: U1.13 U2.68 90.675,67.49 94.737,71.552 v1@97.333,71.552
  Bottom Layer w0.203: v1@97.333,71.552 97.38,71.599 97.761,71.599 99.991,73.829 103.984,73.829 105.436,75.28 CN1.7
  other v1: 97.335,71.552
HD9: CN1.45 U1.12 U2.69 | length 34.2
  Top Layer w0.203: U1.12 U2.69 90.94,66.84 94.919,70.819 v1(96.571,70.819)
  Bottom Layer w0.203: v1(96.571,70.819) 97.946,70.819 100.469,73.342 104.253,73.342 105.691,74.78 CN1.45
HD10: CN1.8 U1.9 U2.72 | length 38.9
  Top Layer w0.203: U1.9 U2.72 89.925,64.89 95.121,70.086 v1(97.335,70.086)
  Bottom Layer w0.203: v1@97.309,70.051 98.02,70.051 99.866,71.897 103.528,71.897 105.91,74.28 CN1.8
HD11: CN1.44 U1.8 U2.73 | length 34.9
  Top Layer w0.203: U1.8 U2.73 90.194,64.24 95.307,69.353 v1(96.571,69.353)
  Bottom Layer w0.203: v1(96.571,69.353) 98.156,69.353 100.117,71.313 103.651,71.313 106.117,73.78 CN1.44
HD12: CN1.9 U1.7 U2.74 | length 39
  Top Layer w0.203: U1.7 U2.74 90.463,63.59 95.493,68.62 v1(97.335,68.62)
  Bottom Layer w0.203: v1@97.335,68.553 97.408,68.626 98.294,68.626 100.396,70.728 103.773,70.728 106.325,73.28 CN1.9
HD13: CN1.43 U1.6 U2.75 | length 35
  Top Layer w0.203: U1.6 U2.75 90.732,62.94 95.679,67.887 v1(96.571,67.887)
  Bottom Layer w0.203: v1(96.571,67.887) 98.316,67.887 100.533,70.104 103.856,70.104 106.532,72.78 CN1.43
HD14: CN1.10 U1.3 U2.78 | length 39.6
  Top Layer w0.203: U1.3 U2.78 89.733,60.99 95.897,67.154 v1(97.335,67.154)
  Bottom Layer w0.203: v1(97.335,67.154) 98.421,67.154 100.792,69.525 104.189,69.525 106.059,71.394 109.211,71.394 110.097,72.28 CN1.10
HD15: CN1.42 U1.2 U2.79 | length 35.7
  Top Layer w0.203: U1.2 U2.79 90.002,60.34 96.083,66.421 v1(96.571,66.421)
  Bottom Layer w0.203: v1(96.571,66.421) 96.623,66.368 98.525,66.368 101.135,68.979 104.569,68.979 106.429,70.838 109.413,70.838 110.31,71.735 111.525,71.735 CN1.42
HD16: CN1.12 U1.68 U2.13 | length 59.3
  Top Layer w0.203: U1.68@62.469,67.514 v1@65.495,67.514 ; v1@101.791,67.512 101.802,67.501 104.739,67.501 U2.13@104.751,67.514
  Bottom Layer w0.203: v1(65.518,67.537) 66.274,67.537 68.813,64.999 98.954,64.999 101.392,67.437 101.715,67.437 101.816,67.537 104.016,67.537 106.759,70.28 CN1.12
  other v1: 101.738,67.512
HD17: CN1.40 U1.69 U2.12 | length 54.6
  Top Layer w0.203: U1.69@62.451,66.846 v1@64.547,66.846 ; v1(102.663,66.689) 102.779,66.689 102.931,66.84 104.763,66.84 U2.12@104.769,66.846
  Bottom Layer w0.203: v1(64.553,66.852) 65.99,66.852 68.529,64.313 99.242,64.313 101.618,66.689 v1(102.663,66.689) 105.252,66.689 108.343,69.78 CN1.40
HD18: CN1.13 U1.72 U2.9 | length 58.1
  Top Layer w0.203: U1.72@62.433,64.878 62.462,64.907 64.487,64.907 v1(64.541,64.961) ; v1(102.667,64.973) 102.722,64.918 U2.9@104.747,64.918
  Bottom Layer w0.203: v1(64.541,64.961) 66.941,64.961 68.214,63.688 99.586,63.688 100.871,64.973 v1(102.667,64.973) 102.661,64.967 104.359,64.967 108.672,69.28 CN1.13
HD19: CN1.39 U1.73 U2.8 | length 55.1
  Top Layer w0.203: U1.73@62.433,64.228 62.457,64.252 65.483,64.252 v1(65.507,64.276) ; v1(101.702,64.287) 101.725,64.264 U2.8@104.751,64.264
  Bottom Layer w0.203: v1(65.507,64.276) 66.657,64.276 67.93,63.003 99.756,63.003 101.041,64.287 v1(101.702,64.287) 104.465,64.287 108.958,68.78 CN1.39
HD20: CN1.14 U1.74 U2.7 | length 59.4
  Top Layer w0.203: U1.74@62.433,63.578 62.439,63.584 64.536,63.584 v1(64.541,63.59) ; v1(102.667,63.602) 102.673,63.596 U2.7@104.769,63.596
  Bottom Layer w0.203: v1(64.541,63.59) 66.364,63.59 67.643,62.311 78.858,62.311 80.298,60.872 89.126,60.872 90.566,62.311 99.979,62.311 101.264,63.596 102.661,63.596 v1(102.667,63.602) 104.577,63.602 109.255,68.28 CN1.14
HD21: CN1.38 U1.75 U2.6 | length 56.5
  Top Layer w0.203: U1.75@62.433,62.928 62.457,62.952 65.483,62.952 v1(65.507,62.976) ; v1(101.702,62.987) 101.725,62.964 U2.6@104.751,62.964
  Bottom Layer w0.203: v1(65.507,62.976) 66.11,62.976 67.389,61.697 78.489,61.697 79.941,60.244 89.465,60.244 90.918,61.697 100.411,61.697 v1@101.696,62.981 ; v1@101.708,62.981 104.72,62.981 109.518,67.78 CN1.38
HD22: CN1.15 U1.78 U2.3 | length 60
  Top Layer w0.203: U1.78@62.433,60.978 62.462,61.007 64.487,61.007 v1(64.541,61.061) ; v1(102.619,62.274) 102.619,61.52 103.149,60.99 U2.3
  Bottom Layer w0.203: v1@64.547,61.067 78.233,61.067 79.643,59.658 89.784,59.658 91.193,61.067 100.613,61.067 101.812,62.266 102.619,62.266 104.744,62.266 109.757,67.28 CN1.15
HD23: CN1.37 U1.79 U2.2 | length 56.2
  Top Layer w0.203: U1.79@62.433,60.328 62.457,60.352 65.483,60.352 v1(65.507,60.376) ; v1(101.946,61.181) 102.788,60.34 U2.2
  Bottom Layer w0.203: v1@65.512,60.381 65.585,60.454 77.95,60.454 79.399,59.005 90.033,59.005 91.482,60.454 100.855,60.454 101.527,61.127 101.891,61.127 v1(101.946,61.181) 104.4,61.181 109.998,66.78 CN1.37
HD24: CN1.17 U1.52 U2.18 | length 72.8
  Top Layer w0.203: U1.52 65.721,77.89 66.655,76.956 66.655,75.529 69.006,73.177 69.006,68.122 v1(68.967,68.083) ; v1(95.225,77.14) 95.25,77.14 101.65,70.74 U2.18 107.132,70.74 108.996,68.876 v1(108.996,64.774)
  Bottom Layer w0.203: v1(68.967,68.083) 78.399,68.083 87.735,77.419 94.89,77.419 95.169,77.14 v1(95.225,77.14) ; v1(108.996,64.774) 109.502,65.28 CN1.17
HD25: CN1.35 U1.53 U2.19 | length 69.2
  Top Layer w0.203: U1.53 65.405,77.24 65.991,76.654 65.991,75.273 68.269,72.995 68.269,68.808 v1(68.231,68.769) ; v1(96.368,77.038) 102.016,71.39 U2.19 107.447,71.39 109.635,69.203 v1(109.635,63.991)
  Bottom Layer w0.203: v1(68.231,68.769) 78.315,68.769 87.509,77.963 95.519,77.963 96.368,77.114 v1(96.368,77.038) ; v1(109.635,63.991) 109.704,64.06 109.704,64.396 110.088,64.78 CN1.35
HD26: CN1.18 U1.56 U2.22 | length 76.6
  Top Layer w0.203: U1.56 64.943,75.29 67.533,72.7 67.533,69.494 v1(67.494,69.455) ; v1(96.291,78.181) 101.133,73.34 U2.22 114.936,73.34 116.357,71.918 116.357,65.456 115.418,64.516 v1(113.538,64.516)
  Bottom Layer w0.203: v1(67.494,69.455) 78.231,69.455 87.284,78.508 95.848,78.508 96.175,78.181 v1(96.291,78.181) ; v1(113.538,64.516) 113.655,64.516 113.891,64.28 CN1.18
HD27: CN1.34 U1.57 U2.23 | length 77.6
  Top Layer w0.203: U1.57 64.673,74.64 66.796,72.517 66.796,70.179 v1(66.757,70.14) ; v1(97.409,78.105) 101.524,73.99 U2.23 115.205,73.99 116.948,72.246 116.948,65.096 115.378,63.525 v1(113.538,63.525)
  Bottom Layer w0.203: v1(66.757,70.14) 78.147,70.14 87.059,79.052 96.462,79.052 v1(97.409,78.105) ; CN1.34 111.583,63.767 113.18,63.767 113.421,63.525 v1(113.538,63.525)
HD28: CN1.19 U1.58 U2.24 | length 74.7
  Top Layer w0.203: U1.58 64.404,73.99 66.06,72.334 66.06,70.865 v1(66.021,70.826) ; v1(97.536,79.096) 101.992,74.64 U2.24 115.474,74.64 117.54,72.575 117.54,63.971 v1(117.526,63.957)
  Bottom Layer w0.203: v1(66.021,70.826) 78.063,70.826 86.833,79.596 97.035,79.596 v1(97.536,79.096) ; CN1.19 115.577,63.287 116.856,63.287 v1(117.526,63.957)
HD29: CN1.33 U1.59 U2.25 | length 79.7
  Top Layer w0.203: U1.59 63.86,73.34 65.249,71.951 65.249,71.547 v1(65.284,71.512) ; v1(99.085,78.613) 102.408,75.29 U2.25 115.743,75.29 118.149,72.885 118.149,63.457 117.227,62.535 v1(113.538,62.535)
  Bottom Layer w0.203: v1(65.284,71.512) 77.979,71.512 86.608,80.141 97.558,80.141 v1(99.085,78.613) ; CN1.33 113.151,62.78 113.396,62.535 v1@113.513,62.535
HD30: CN1.20 U1.62 U2.28 | length 80.3
  Top Layer w0.203: v1(60.772,71.48) 60.833,71.418 62.417,71.418 U1.62 ; v1(100.178,78.638) 101.576,77.24 U2.28 114.764,77.24 118.722,73.282 118.722,63.187 118.567,63.033 v1(118.567,62.916)
  Bottom Layer w0.203: v1(60.772,71.48) 60.772,71.597 61.37,72.195 77.892,72.195 86.382,80.685 98.131,80.685 v1(100.178,78.638) ; CN1.20 117.906,62.28 v1@118.542,62.916
HD31: CN1.32 U1.63 U2.29 | length 89.1
  Top Layer w0.203: v1(59.81,71.834) 59.81,71.354 60.425,70.74 U1.63 ; v1(101.168,79.019) 102.298,77.89 U2.29 115.033,77.89 119.313,73.61 119.313,62.544 118.567,61.798 v1(118.567,61.773)
  Bottom Layer w0.203: v1(59.81,71.834) 59.81,71.856 60.784,72.83 77.757,72.83 86.157,81.229 98.958,81.229 v1(101.168,79.019) ; CN1.32 v1@118.567,61.78
MA4/TA0: CN2.10 U3.19 | length 7.9
  Top Layer w0.203: U3.19 56.138,69.846 57.439,69.846 v1@57.977,69.308
  Bottom Layer w0.203: CN2.10 54.683,72.28 57.572,69.391 57.871,69.391 v1(57.954,69.308)
MA5/TA1: CN2.11 U3.18 | length 8.2
  Top Layer w0.203: U3.18 56.203,68.511 57.336,68.511 v1(57.954,67.893)
  Bottom Layer w0.203: CN2.11 54.26,71.28 54.338,71.202 54.338,71.035 57.398,67.976 57.871,67.976 v1(57.954,67.893)
MA6/TA2: CN2.12 U3.17 | length 8
  Top Layer w0.203: U3.17 56.139,67.315 57.467,67.315 v1@57.924,66.858
  Bottom Layer w0.203: CN2.12 54.26,70.28 57.599,66.941 57.841,66.941 v1@57.924,66.858
  other v1: 57.954,66.827
MA7/TA3: CN2.13 U3.16 | length 7.9
  Top Layer w0.203: U3.16 56.149,66.055 57.483,66.055 57.777,65.761 v1@57.894,65.761
  Bottom Layer w0.203: CN2.13 53.418,69.202 54.454,69.202 v1@57.894,65.761
  other v1: 57.954,65.761
MA8/TA4: CN2.14 U3.15 | length 8.5
  Top Layer w0.203: U3.15 56.845,64.77 57.048,64.567 57.048,63.707 v1(57.057,63.699)
  Bottom Layer w0.203: CN2.14 54.26,68.28 57.057,65.483 v1(57.057,63.699)
MA9/TA5: CN2.39 U3.13 | length 7.4
  Top Layer w0.203: U3.13 48.533,66.04 v1(51.284,68.792)
  Bottom Layer w0.203: CN2.39 49.346,68.786 51.242,68.786 51.248,68.792 v1@51.259,68.78
MA10/TA6: CN2.40 U3.12 | length 7.3
  Top Layer w0.203: U3.12 48.5,67.31 50.896,69.707 51.202,69.707 v1(51.284,69.79)
  Bottom Layer w0.203: CN2.40 49.345,69.785 51.28,69.785 v1(51.284,69.79)
MA11/TA7: CN2.41 U3.11 | length 7.2
  Top Layer w0.203: U3.11 48.417,68.58 50.624,70.787 v1(51.284,70.787)
  Bottom Layer w0.203: CN2.41 49.344,70.784 51.281,70.784 v1(51.284,70.787)
PCLK: CN1.24 U1.89 U2.89 | length 55
  Top Layer w0.203: v1(70.536,52.57) 70.553,52.587 70.553,56.748 U1.89 ; U2.89 94.696,56.761 94.696,55.266 95.58,54.381 v1(95.58,53.797)
  Bottom Layer w0.203: v1(70.536,52.57) 70.544,52.578 94.361,52.578 v1(95.58,53.797) 95.58,53.873 96.934,55.227 106.43,55.227 109.482,58.28 CN1.24
T_CE2: J11.2 RT1.1 U1.97 U2.92 | length 105.9
  Top Layer w0.203: U1.97 75.77,53.313 79.019,50.063 101.27,50.063 103.276,52.07 ; U2.92 96.678,56.793 96.678,57.848 98.701,59.871 101.535,59.871 103.276,58.129 103.276,52.07 ; J11.2 108.966,84.126 109.652,83.44 RT1.1 109.652,79.979 111.131,78.5 115.386,78.5 119.904,73.982 119.904,62.09 117.855,60.041 112.729,60.041 111.466,58.779 111.466,50.777 110.981,50.291 105.056,50.291 103.276,52.07
TOE#: CN2.7 U3.22 | length 6.8
  Top Layer w0.203: U3.22 56.149,73.675 v1@57.815,73.675
  Bottom Layer w0.203: CN2.7 55.649,75.28 57.225,73.703 57.797,73.703 v1(57.826,73.675)
TWE#: CN2.2 U3.27 | length 8.3
  Top Layer w0.203: U3.27 58.166,80.01 v1@58.708,80.552
  Bottom Layer w0.203: CN2.2 58.359,80.28 58.631,80.552 v1(58.748,80.552)
VCC: C4.1 C5.1 C6.1 CN2.22 CN2.23 CN2.24 CN2.29 CN2.30 CN2.31 J15.3 RT2.2 U1.85 U2.85 U2.97 U3.28 | length 22.1
  Top Layer w0.203: U2.85 U2.85@92.103,56.768 ; U2.97 U2.97@99.901,56.766
  Top Layer w0.254: v1(67.963,58.493) 67.967,58.489 67.967,56.768 U1.85@67.97,56.765 ; v1(91.364,59.182) 91.467,59.182 91.719,58.929 91.921,58.929 92.1,58.751 92.1,56.77 U2.85@92.103,56.768 ; U2.97@99.901,56.766 v1(99.901,58.934)
  Top Layer w0.508: U3.28 56.136,81.282 v2(56.136,82.569) ; v1(64.447,52.966) 64.449,52.964 65.484,52.964 RT2.2 ; v2(107.525,51.43) 108.839,51.43 J15.3
  Bottom Layer w0.33: v2@47.317,58.78 CN2.29 ; v2@47.317,60.78 CN2.31 ; CN2.24 v2@55.363,58.28 ; CN2.22 53.346,60.274 55.369,60.274 v2@55.374,60.268
  Bottom Layer w0.508: v2(55.369,58.274) v2@55.387,58.256 ; C4.1 66.814,58.505 67.951,58.505 v1(67.963,58.493) ; v1(91.364,59.182) 91.374,59.193 92.49,59.193 C5.1@92.5,59.203 ; v1@99.843,58.958 v1@99.877,58.958 ; v1(99.901,58.934) 99.926,58.958 100.75,58.958 100.966,59.174 C6.1 ; v2(107.525,51.43) v2@107.527,51.433
  other v2: 47.311,58.786 55.369,60.268 47.311,60.786
pads on no net: CN1.0 CN2.0 CN2.15 CN2.26 CN2.27 CN2.38 U1.1 U1.16 U1.30 U1.31 U1.38 U1.39 U1.42 U1.43 U1.51 U1.64 U1.66 U1.80 U2.1 U2.16 U2.30 U2.31 U2.38 U2.39 U2.42 U2.43 U2.51 U2.64 U2.66 U2.80
copper on no net:
  other v3: 51.34,54.73 113.57,54.73 51.34,82.83 113.57,82.83

## Polygon pours and split planes (outlines as drawn)
GND on Layer 1 (split plane): 118.309,87.112 118.506,87.083 118.7,87.034 118.888,86.967 119.068,86.882 119.239,86.779 119.399,86.661 119.547,86.527 119.681,86.379 119.799,86.219 119.902,86.048 119.987,85.868 120.054,85.68 120.103,85.486 120.132,85.289 120.141,85.106 120.14,85.09 120.14,52.07 120.141,52.054 120.132,51.871 120.103,51.674 120.054,51.48 119.987,51.292 119.902,51.112 119.799,50.941 119.681,50.781 119.547,50.633 119.399,50.499 119.239,50.381 119.068,50.278 118.888,50.193 118.7,50.126 118.506,50.077 118.309,50.048 118.126,50.039 118.11,50.04 46.99,50.04 46.974,50.039 46.791,50.048 46.594,50.077 46.4,50.126 46.212,50.193 46.032,50.278 45.861,50.381 45.701,50.499 45.553,50.633 45.419,50.781 45.301,50.941 45.198,51.112 45.113,51.292 45.046,51.48 44.997,51.674 44.968,51.871 44.959,52.054 44.96,52.07 44.96,85.09 44.959,85.106 44.968,85.289 44.997,85.486 45.046,85.68 45.113,85.868 45.198,86.048 45.301,86.219 45.419,86.379 45.553,86.527 45.701,86.661 45.861,86.779 46.032,86.882 46.212,86.967 46.4,87.034 46.594,87.083 46.791,87.112 46.974,87.121 46.99,87.12 118.11,87.12 118.126,87.121
VCC on Layer 2 (split plane): 46.99,87.12 57.557,87.12 57.557,82.144 55.853,80.44 50.015,80.44 49.975,80.435 49.938,80.42 49.906,80.395 49.288,79.777 49.263,79.745 49.248,79.708 49.243,79.668 49.243,67.538 46.428,64.723 46.404,64.692 46.389,64.655 46.383,64.615 46.383,61.873 46.389,61.833 46.404,61.796 46.428,61.764 46.74,61.452 46.758,61.438 46.772,61.428 46.809,61.412 46.849,61.407 48.964,61.407 50.484,59.888 50.516,59.863 50.553,59.848 50.592,59.843 52.681,59.843 52.721,59.848 52.758,59.863 52.79,59.888 53.903,61 59.902,61 62.623,58.279 62.655,58.255 62.692,58.239 62.732,58.234 65.308,58.234 65.348,58.239 65.385,58.255 65.416,58.279 66.397,59.26 68.853,59.26 70.943,57.17 70.975,57.145 71.012,57.13 71.051,57.125 86.946,57.125 86.985,57.13 87.022,57.145 87.054,57.17 89.786,59.901 92.123,59.901 94.016,58.009 94.048,57.984 94.085,57.969 94.125,57.964 96.941,57.964 96.981,57.969 97.018,57.984 97.05,58.009 98.697,59.656 100.645,59.656 102.898,57.403 102.93,57.379 102.967,57.364 103.007,57.358 120.14,57.358 120.14,52.07 120.141,52.054 120.132,51.871 120.103,51.674 120.054,51.48 119.987,51.292 119.902,51.112 119.799,50.941 119.681,50.781 119.547,50.633 119.399,50.499 119.239,50.381 119.068,50.278 118.888,50.193 118.7,50.126 118.506,50.077 118.309,50.048 118.126,50.039 118.11,50.04 46.99,50.04 46.974,50.039 46.791,50.048 46.594,50.077 46.4,50.126 46.212,50.193 46.032,50.278 45.861,50.381 45.701,50.499 45.553,50.633 45.419,50.781 45.301,50.941 45.198,51.112 45.113,51.292 45.046,51.48 44.997,51.674 44.968,51.871 44.959,52.054 44.96,52.07 44.96,85.09 44.959,85.106 44.968,85.289 44.997,85.486 45.046,85.68 45.113,85.868 45.198,86.048 45.301,86.219 45.419,86.379 45.553,86.527 45.701,86.661 45.861,86.779 46.032,86.882 46.212,86.967 46.4,87.034 46.594,87.083 46.791,87.112 46.974,87.121
33VCC on Layer 2 (split plane): 118.309,87.112 118.506,87.083 118.7,87.034 118.888,86.967 119.068,86.882 119.239,86.779 119.399,86.661 119.547,86.527 119.681,86.379 119.799,86.219 119.902,86.048 119.987,85.868 120.054,85.68 120.103,85.486 120.132,85.289 120.141,85.106 120.14,85.09 120.14,57.666 103.07,57.666 100.818,59.918 100.786,59.943 100.749,59.958 100.709,59.963 98.634,59.963 98.594,59.958 98.557,59.943 98.525,59.918 96.878,58.271 94.188,58.271 92.296,60.164 92.264,60.188 92.227,60.203 92.187,60.209 89.722,60.209 89.683,60.203 89.645,60.188 89.614,60.164 86.882,57.432 71.115,57.432 69.025,59.522 68.993,59.546 68.956,59.562 68.916,59.567 66.333,59.567 66.293,59.562 66.256,59.546 66.224,59.522 65.244,58.542 62.795,58.542 60.074,61.263 60.042,61.287 60.005,61.302 59.966,61.308 53.839,61.308 53.799,61.302 53.762,61.287 53.73,61.263 52.618,60.15 50.656,60.15 49.137,61.67 49.105,61.694 49.068,61.709 49.028,61.715 46.912,61.715 46.691,61.936 46.691,64.551 49.505,67.365 49.529,67.397 49.545,67.434 49.55,67.474 49.55,79.604 50.079,80.133 55.916,80.133 55.956,80.138 55.993,80.153 56.025,80.178 57.819,81.972 57.844,82.004 57.859,82.041 57.864,82.08 57.864,82.081 57.864,87.12 118.11,87.12 118.126,87.121

## Other copper
Top Layer:
  rectangle net GND: 49.751,60.072 52.758,65.722
  rectangle net 33VCC: 53.37,61.554 55.964,63.823
  rectangle net 33VCC: 46.668,61.676 49.149,63.945
Bottom Layer:
  rectangle net GND: 50.859,63.85 53.776,65.04
  rectangle net GND: 51.272,64.28 53.776,66.461
  rectangle net VCC: 48.968,58.795 49.911,60.786
  rectangle net VCC: 52.968,58.295 53.911,60.286
  region: 83.379,87.559
  region: 83.379,87.559
  region: 83.379,87.559
  region: 83.379,87.559
  region: 83.379,87.559
  region: 83.379,87.559
Layer 2 (plane layer: these items are gaps in the copper):
  lines w0.305: 57.71,87.47 57.71,82.08 55.916,80.287 50.015,80.287 49.396,79.668 49.396,67.474 46.537,64.615 46.537,61.873 46.849,61.561 49.028,61.561 50.592,59.996 52.681,59.996 53.839,61.154 59.966,61.154 62.732,58.388 65.308,58.388 66.333,59.413 68.916,59.413 71.051,57.278 86.946,57.278 89.722,60.055 92.187,60.055 94.125,58.117 96.941,58.117 98.634,59.81 100.709,59.81 103.007,57.512 120.422,57.512

## Silkscreen, mask and mechanical layers (free items; w line width, h text height)
Mechanical 1:
  the board outline again, w0.15